# Altium PCB Ultrasonic_Localisation.PcbDoc
Units mm, origin at the board's own origin, x right, y up, seen from the top; angles counter-clockwise.
Board outline 29 x 59 mm, 4 copper layers (Top Layer, MidLayer1, GroundPlane, Bottom Layer); 51 components, 45 nets, 305 pads, 48 vias.
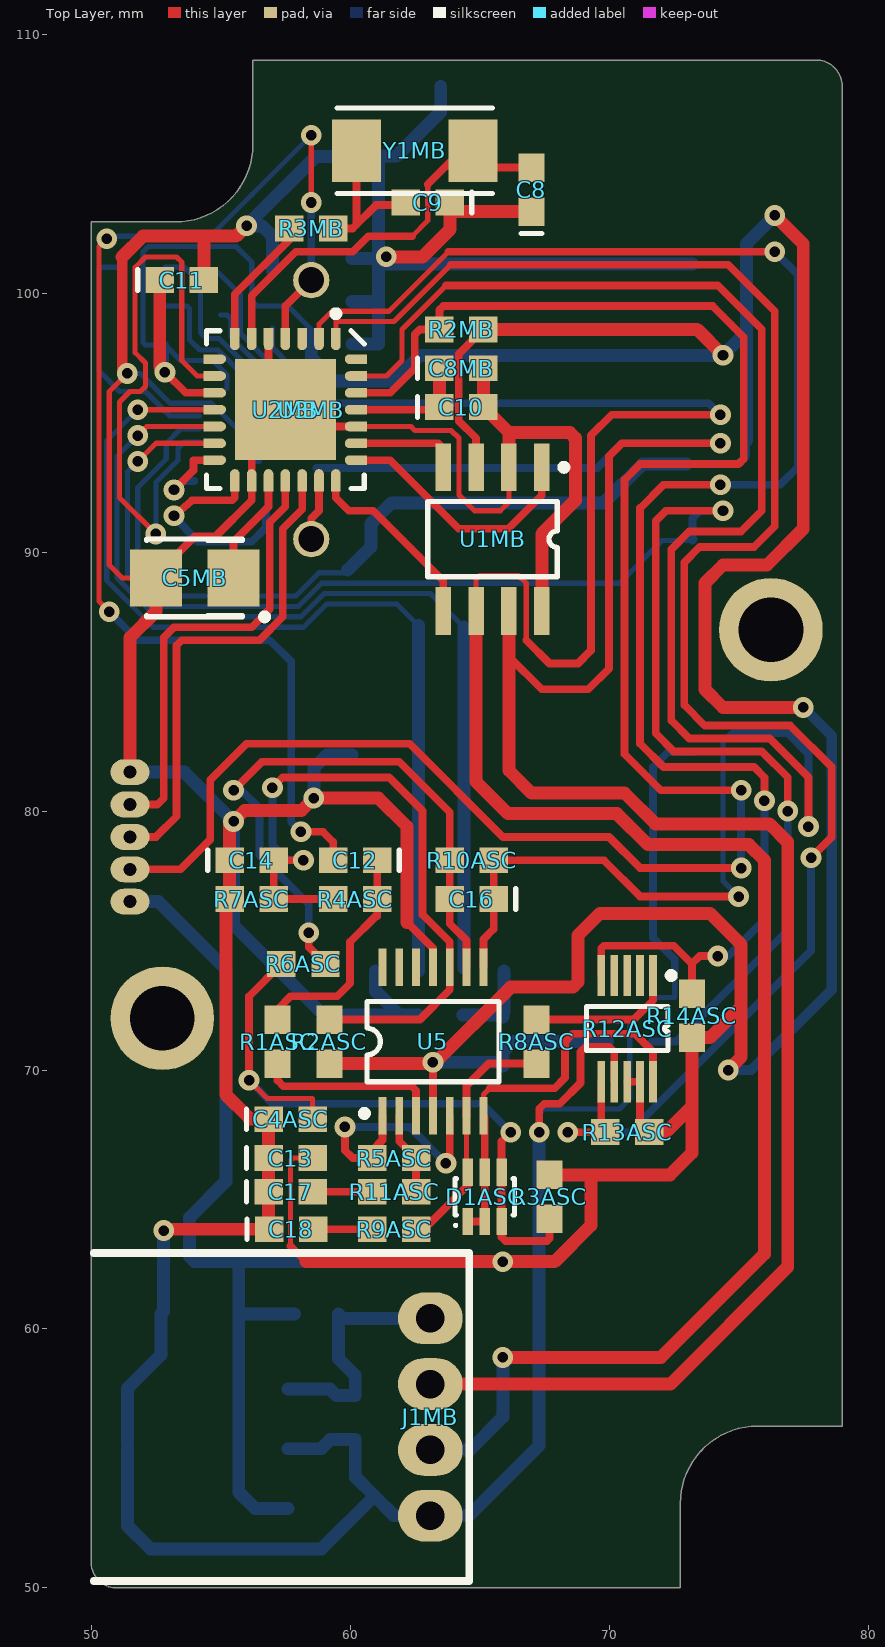
[diagram p0: Top Layer view]
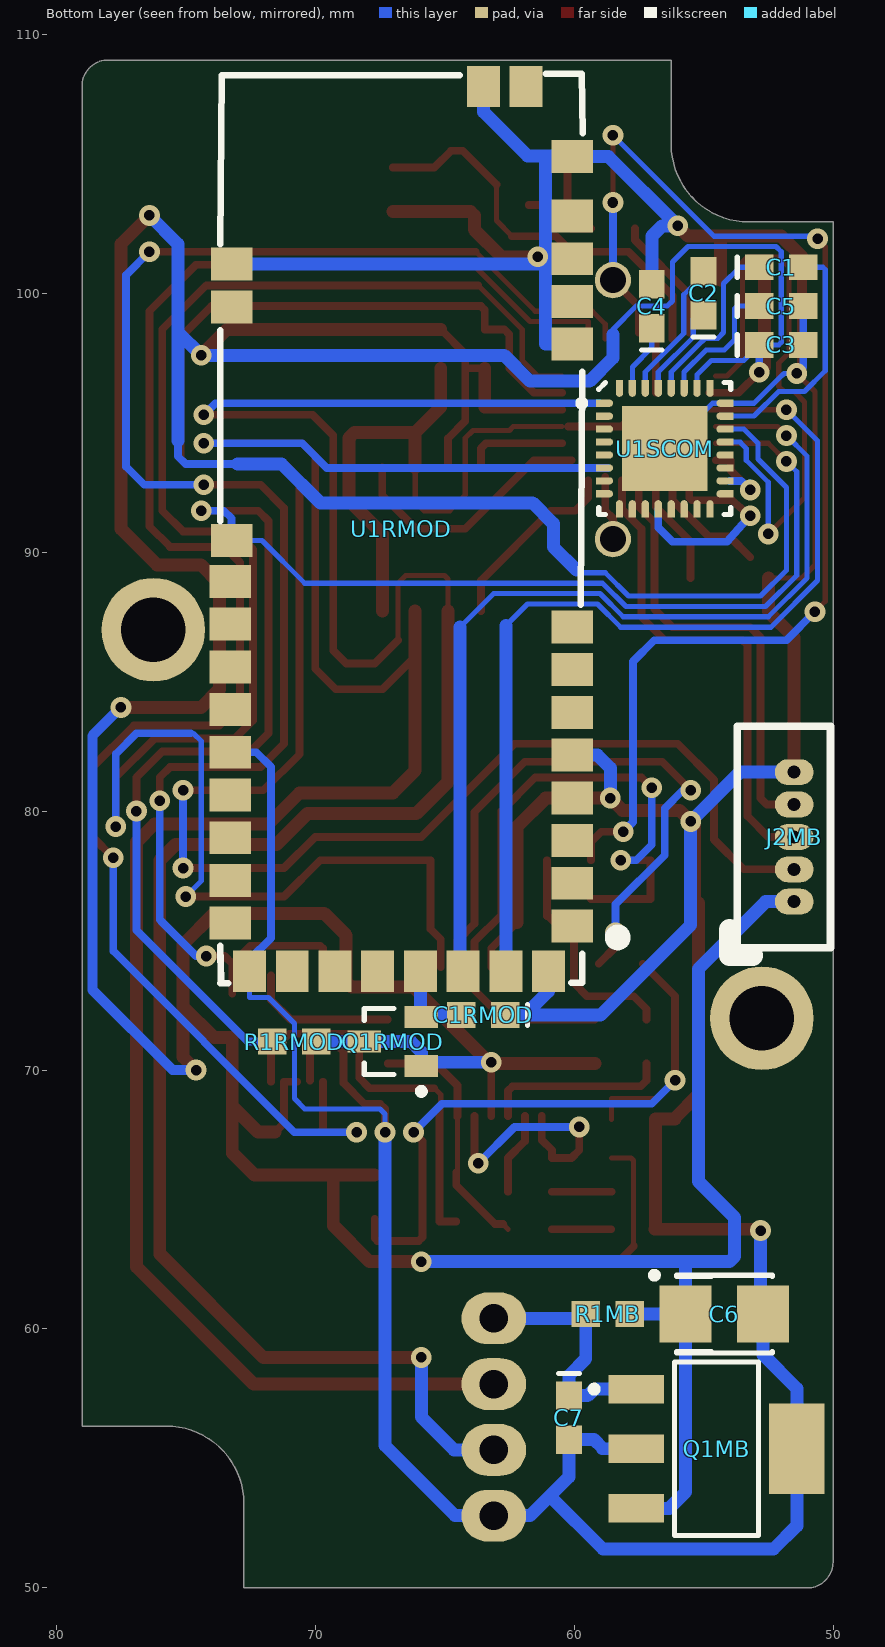
[diagram p1: Bottom Layer view, seen from below]
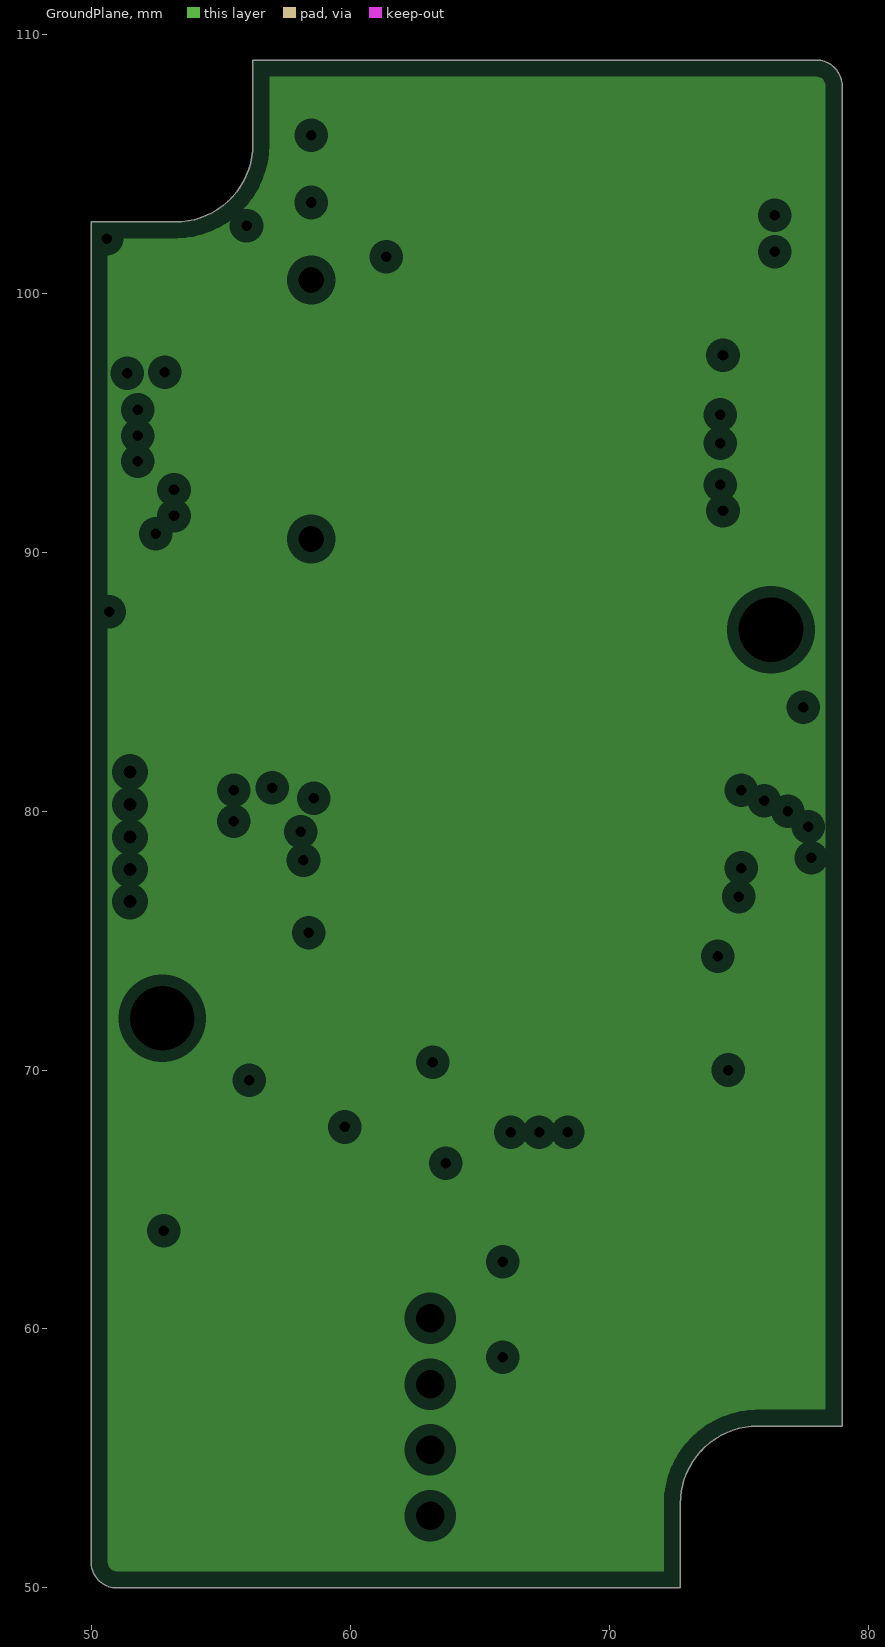
[diagram p2: GroundPlane, clearances drawn from the general rule]

## Layer stack, top to bottom
Top Layer: signal copper 0.036
Dielectric: prepreg 0.32, FR-4, Dk 4.8
MidLayer1: signal copper 0.036
Dielectric: core 0.32, FR-4, Dk 4.8
GroundPlane: plane copper 0.036
Dielectric: prepreg 0.32, FR-4, Dk 4.8
Bottom Layer: signal copper 0.036

## Board outline
50,51 50,102.75 53.25,102.75 ccw(c53.25,105.75) 56.25,105.75 56.25,109 78,109 cw(c78,108) 79,108 79,56.25 75.75,56.25 ccw(c75.75,53.25) 72.75,53.25 72.75,50 51,50 cw(c51,51)

## Design rules (kind name [scope] priority, off if disabled: settings)
Clearance [All] p1: gap=0.152
ComponentClearance [All] p1 off: gap=0.254 collisioncheckmode=3 verticalgap=0.254
HoleSize [All] p1: absolutevalues=TRUE maxlimit=4 minlimit=0.2 maxpercent=80.000 minpercent=20.000
PlaneClearance [All] p1: clearance=0.445
PlaneConnect [All] p1: planeconnectstyle=Direct reliefexpansion=0.508 reliefentries=4 reliefconductorwidth=0.254 reliefairgap=0.254
PolygonConnect [All] p1: connectstyle=Direct reliefconductorwidth=0.254 reliefentries=4 polygonreliefangle="90 Angle"
RoomDefinition S2 [InComponentClass('S2')] p1: confinementstyle=ConfineIn formatcopy=TRUE lockcomponents=FALSE outline 63.1,105.5 49.5,105.5 49.5,84 63.1,84
RoomDefinition Ultrasonic_Localisation [InComponentClass('Ultrasonic_Localisation')] p2: confinementstyle=ConfineIn formatcopy=TRUE lockcomponents=FALSE outline 48,47.85 77.475,47.85 77.475,109 48,109
RoomDefinition S3 [InComponentClass('S3')] p3: confinementstyle=ConfineIn formatcopy=TRUE lockcomponents=FALSE outline 76.3,68.9 56.8,68.9 56.8,110.9 76.3,110.9
RoomDefinition S1 [InComponentClass('S1')] p4: confinementstyle=ConfineIn formatcopy=TRUE lockcomponents=FALSE outline 52.7,62.2 75.2,62.2 75.2,82.4 52.7,82.4
RoutingVias [All] p1: holewidth=0.2 width=0.65 viastyle="Through Hole" minholewidth=0.2 minwidth=0.65 maxholewidth=1.5 maxwidth=2.1
ShortCircuit ShortCircuit_Unconnected_Pins [IsPad and not InnetClass('All') vs IsPad and not InnetClass('All')] p1: allowed=TRUE
ShortCircuit [All] p2: allowed=FALSE
SolderMaskExpansion [All] p1: expansion=0.075
TestPointUsage [All] p1: valid=0 allowmultiple=FALSE
Testpoint [All] p1: side=15 testpointundercomponent=TRUE minsize=1.016 maxsize=2.54 preferedsize=1.524 minholesize=0 maxholesize=1.016 preferedholesize=0.813 testpointgrid=0.025 style=1023 order=0-112345678
Width [All] p1: maxlimit=3 minlimit=0.152 preferedwidth=0.3 minimp=50.000000 maximp=50.000000 favimp=50.000000
14 further rules are at their usual default settings.

## Classes and differential pairs
component class S1: C4ASC C12 C13 C14 C15 C16 C17 C18 D1 D1ASC R1ASC R2ASC R3ASC R4 R4ASC R5 R5ASC R6 R6ASC R7 R7ASC R8 R8ASC R9 R9ASC R10 R10ASC R11 R11ASC R12 R12ASC R13 R13ASC R14 R14ASC U5
component class S2: C1 C2 C3 C4 C5 U1SCOM U6
component class Ultrasonic_Localisation: C5MB C6 C7 C8 C8MB C9 C10 C11 J1 J1MB J2 J2MB Q1 Q1MB R1 R1MB R2 R2MB R3 R3MB U1 U1MB U2 U2MB U3MB U4 Y1 Y1MB
component class S3: C1RMOD Q1RMOD R1RMOD U1RMOD

## Components (designator, comment, footprint, x,y, rotation, side; value= is the part's Value field where it differs from the comment)
C1 "UMK107BJ104KA-T" CC1608-0603 52,101 r180 bottom (schematic designator C1SCOM)
C1RMOD "Cap" CC1608-0603 63.5,72.125 r0 bottom
C2 "UMK107BJ104KA-T" CC1608-0603 55,100 r90 bottom (schematic designator C2SCOM)
C3 "UMK107BJ104KA-T" CC1608-0603 52,98 r180 bottom (schematic designator C3SCOM)
C4 "UMK107BJ104KA-T" CC1608-0603 57,99.5 r90 bottom (schematic designator C4SCOM)
C4ASC "Cap" CC1608-0603 57.7,68.1 r0 top
C5 "UMK107BJ104KA-T" CC1608-0603 52,99.5 r180 bottom (schematic designator C5SCOM)
C5MB "TPSB106K016R0800" TC3528-1411 54,89 r180 top
C6 "TPSB106K016R0800" TC3528-1411 54.2,60.575 r180 bottom (schematic designator C1MB)
C7 "UMK107BJ104KA-T" CC1608-0603 60.2,56.575 r270 bottom (schematic designator C2MB)
C8 "Cap" CC1608-0603 67,104 r90 top (schematic designator C6MB)
C8MB "UMK107BJ104KA-T" CC1608-0603 64.3,97.1 r0 top
C9 "Cap" CC1608-0603 63,103.5 r180 top (schematic designator C7MB)
C10 "UMK107BJ104KA-T" CC1608-0603 64.3,95.6 r0 top (schematic designator C3MB)
C11 "UMK107BJ104KA-T" CC1608-0603 53.5,100.5 r0 top (schematic designator C4MB)
C12 "Cap" CC1608-0603 60.2,78.1 r180 top (schematic designator C1ASC)
C13 "Cap" CC1608-0603 57.7,66.6 r0 top (schematic designator C2ASC)
C14 "Cap" CC1608-0603 56.2,78.1 r0 top (schematic designator C3ASC)
C16 "Cap" CC1608-0603 64.7,76.6 r180 top (schematic designator C5ASC)
C17 "Cap" CC1608-0603 57.7,65.3 r0 top (schematic designator C6ASC)
C18 "Cap" CC1608-0603 57.725,63.85 r0 top (schematic designator C7ASC)
D1ASC "BAV99DW-7-F" SOT-323-6L 65.2,65.1 r0 top
J1MB "70553-0003" CON_CAN_Device-4 63.1,56.6 r270 top
J2MB "53048-0510" CON_ISP 51.5,79 r90 bottom
Q1MB "MIC5201-5.0YS" DSO-G3 54.5,55.375 r270 bottom
Q1RMOD "BC846B" SO-G3 67,71.1 r90 bottom
R1ASC "Res" CR1608-0603 57.2,71.1 r90 top
R1MB "Res" CR1608-0603 58.7,60.575 r0 bottom
R1RMOD "Res" CR1608-0603 70.8,71.1 r180 bottom
R2ASC "Res" CR1608-0603 59.2,71.1 r270 top
R2MB "Res" CR1608-0603 64.3,98.6 r0 top
R3ASC "Res" CR1608-0603 67.7,65.1 r90 top
R3MB "Res" CR1608-0603 58.5,102.5 r0 top
R4ASC "Res" CR1608-0603 60.2,76.6 r180 top
R5ASC "Res" CR1608-0603 61.7,66.6 r0 top
R6ASC "Res" CR1608-0603 58.2,74.1 r180 top
R7ASC "Res" CR1608-0603 56.2,76.6 r0 top
R8ASC "Res" CR1608-0603 67.2,71.1 r90 top
R9ASC "Res" CR1608-0603 61.7,63.85 r0 top
R10ASC "Res" CR1608-0603 64.7,78.1 r180 top
R11ASC "Res" CR1608-0603 61.7,65.3 r180 top
R12ASC "AD5161" TSSO3x5-G10 70.7,71.6 r180 top
R13ASC "Res" CR1608-0603 70.7,67.6 r0 top
R14ASC "Res" CR1608-0603 73.2,72.1 r90 top
U1MB "p" SO-G8/E2.9 65.5,90.5 r180 top
U1RMOD "nanoLOC AVR Module" nano_LOC_AVR_Module35x14 66.675,90.9 r90 bottom
U1SCOM "p" QFN5X5-32 56.5,94 r270 bottom
U2MB "dsPIC33FJ128GP802" QFN6X6-28 57.5,95.5 r180 top
U3MB "MAXBOTIX_SENSOR" "Maxbotix Sensor" 58.5,95.5 r270 top
U5 "LMV324IPWR" TSSO5x6-G14/X.3 63.2,71.1 r0 top (schematic designator U1ASC)
Y1MB "CS10-16.000MABJ-UT" CS10 62.5,105.5 r180 top

## Footprints (in the part's own frame and the unit in brackets; to place one, negate y for a bottom-side part, rotate by r counter-clockwise, add the part's x,y. Pads: shape width x height; smd on the part's side, far side on the other; paste and mask are expansions set on the pad)
CC1608-0603 [mm] "Chip Capacitor; Body 1.6 x 0.8 mm (LxW typ)"
  rect 1.1x1 smd: 1(-0.85,0) 2(0.85,0)
  silkscreen extent -1.7,-0.4 -1.7,0.4
CON_CAN_Device-4 [mm] "4-pin CAN connector - device side"
  oval 2x2.5 hole 1.1: 1(-3.81,0) 2(-1.27,0) 3(1.27,0) 4(3.81,0)
  silkscreen extent -6.33,-13 6.33,1.5
CON_ISP [mm] "Microchip ISP Connector"
  oval 1x1.5 hole 0.5: 1(-2.5,0) 2(-1.25,0) 3(0,0) 4(1.25,0) 5(2.5,0)
  silkscreen extent -4.57,-1.4 4.28,2.5
CR1608-0603 [mm] "Chip Resistor; Body 1.6 x 0.8 mm (LxW typ)"
  rect 1.1x1 smd: 1(-0.85,0) 2(0.85,0)
CS10 [mm] "Crystal"
  rect 1.9x2.4 smd: 1(-2.25,0) 2(2.25,0)
  silkscreen extent -3,-1.65 3,1.65
DSO-G3 [mm] "SOT-223/SC-73; 4 Leads; Body 6.7 x 7.3 mm, inc. leads (LxW max)"
  rect 1.1x2.15 smd: 1(-2.3,-3.1) 2(0,-3.1) 3(2.3,-3.1)
  rect 3.5x2.15 smd: 4(0,3.1)
  silkscreen extent -3.35,-4.85 3.35,1.62
"Maxbotix Sensor" [mm] "Maxbotix Ultrasonic Sensor"
  round 1.4 hole 1: 1(-5,0) 2(5,0)
nano_LOC_AVR_Module35x14 [mm] "Footprint for the nano_LOC_AVR_Module"
  round 0.8 on Mech1: 1(-15.37,-1.86) 2(-14.1,-1.86) 3(-14.1,-3.13) 4(-14.1,-4.4) 5(-15.37,-4.4) 6(-15.37,-3.13) 7(-9.5,1.74) 8(-8.23,1.74) 9(-8.23,0.47) 10(-8.23,-0.8) 11(-9.5,-0.8) 12(-9.5,0.47)
  rect 1.27x1.6 smd: 1(-15.34,-6.6) 2(-13.69,-6.6) 3(-12.04,-6.6) 4(-10.39,-6.6) 5(-8.74,-6.6) 6(-7.09,-6.6) 7(-5.44,-6.6) 8(-3.79,-6.6) 10(7.13,-6.6) 11(8.78,-6.6) 12(10.43,-6.6) 13(12.08,-6.6) 14(14.37,-6.6) 17(10.22,6.55) 18(8.57,6.55) 19(-0.45,6.55) 20(-2.03,6.6) 21(-3.68,6.6) 22(-5.33,6.6) 23(-6.98,6.6) 24(-8.63,6.6) 25(-10.28,6.6) 26(-11.93,6.6) 27(-13.58,6.6) 28(-15.23,6.6)
  rect 1.6x1.27 smd: 15(17.08,-4.825) 16(17.08,-3.175) 29(-17.08,5.86) 30(-17.08,4.21) 31(-17.08,2.56) 32(-17.08,0.91) 33(-17.08,-0.74) 34(-17.08,-2.39) 35(-17.08,-4.04) 36(-17.08,-5.69)
  silkscreen extent -17.55,-8.61 17.57,6.99
QFN5X5-32 [mm] "Quad Flat No Lead; 32 Terminals; Body 5 x 5 mm; Pitch 0.5 mm"
  rect 0.28x0.28 smd: 1(-1.75,-2.515) 2(-1.25,-2.515) 3(-0.75,-2.515) 4(-0.25,-2.515) 5(0.25,-2.515) 6(0.75,-2.515) 7(1.25,-2.515) 8(1.75,-2.515) 9(2.515,-1.75) 10(2.515,-1.25) 11(2.515,-0.75) 12(2.515,-0.25) 13(2.515,0.25) 14(2.515,0.75) 15(2.515,1.25) 16(2.515,1.75) 17(1.75,2.515) 18(1.25,2.515) 19(0.75,2.515) 20(0.25,2.515) 21(-0.25,2.515) 22(-0.75,2.515) 23(-1.25,2.515) 24(-1.75,2.515) 25(-2.515,1.75) 26(-2.515,1.25) 27(-2.515,0.75) 28(-2.515,0.25) 29(-2.515,-0.25) 30(-2.515,-0.75) 31(-2.515,-1.25) 32(-2.515,-1.75)
  oval 0.28x0.66 smd: 1(-1.75,-2.325) 2(-1.25,-2.325) 3(-0.75,-2.325) 4(-0.25,-2.325) 5(0.25,-2.325) 6(0.75,-2.325) 7(1.25,-2.325) 8(1.75,-2.325) 17(1.75,2.325) 18(1.25,2.325) 19(0.75,2.325) 20(0.25,2.325) 21(-0.25,2.325) 22(-0.75,2.325) 23(-1.25,2.325) 24(-1.75,2.325)
  oval 0.66x0.28 smd: 9(2.325,-1.75) 10(2.325,-1.25) 11(2.325,-0.75) 12(2.325,-0.25) 13(2.325,0.25) 14(2.325,0.75) 15(2.325,1.25) 16(2.325,1.75) 25(-2.325,1.75) 26(-2.325,1.25) 27(-2.325,0.75) 28(-2.325,0.25) 29(-2.325,-0.25) 30(-2.325,-0.75) 31(-2.325,-1.25) 32(-2.325,-1.75)
  rect 3.3x3.3 smd: 33(0,0)
  silkscreen extent -2.55,-3.33 2.55,2.55
QFN6X6-28 [mm] "Quad Flat No Lead, Plastic, Punch; 28 Terminals; Body 6 x 6 mm; Pitch 0.65 mm"
  rect 0.37x0.37 smd: 1(-1.95,-2.97) 2(-1.3,-2.97) 3(-0.65,-2.97) 4(0,-2.97) 5(0.65,-2.97) 6(1.3,-2.97) 7(1.95,-2.97) 8(2.97,-1.95) 9(2.97,-1.3) 10(2.97,-0.65) 11(2.97,0) 12(2.97,0.65) 13(2.97,1.3) 14(2.97,1.95) 15(1.95,2.97) 16(1.3,2.97) 17(0.65,2.97) 18(0,2.97) 19(-0.65,2.97) 20(-1.3,2.97) 21(-1.95,2.97) 22(-2.97,1.95) 23(-2.97,1.3) 24(-2.97,0.65) 25(-2.97,0) 26(-2.97,-0.65) 27(-2.97,-1.3) 28(-2.97,-1.95)
  oval 0.37x0.86 smd: 1(-1.95,-2.725) 2(-1.3,-2.725) 3(-0.65,-2.725) 4(0,-2.725) 5(0.65,-2.725) 6(1.3,-2.725) 7(1.95,-2.725) 15(1.95,2.725) 16(1.3,2.725) 17(0.65,2.725) 18(0,2.725) 19(-0.65,2.725) 20(-1.3,2.725) 21(-1.95,2.725)
  oval 0.86x0.37 smd: 8(2.725,-1.95) 9(2.725,-1.3) 10(2.725,-0.65) 11(2.725,0) 12(2.725,0.65) 13(2.725,1.3) 14(2.725,1.95) 22(-2.725,1.95) 23(-2.725,1.3) 24(-2.725,0.65) 25(-2.725,0) 26(-2.725,-0.65) 27(-2.725,-1.3) 28(-2.725,-1.95)
  rect 3.9x3.9 smd: 29(0,0)
  silkscreen extent -3.05,-3.83 3.05,3.05
SO-G3 [mm] "SOT-23; 3 Leads; Body 3.0 x 2.6 mm, inc. leads (LxW max)"
  rect 0.85x1.3 smd: 1(-0.95,-1.1) 2(0.95,-1.1) 3(0,1.1)
  silkscreen extent -2.05,-1.22 1.28,1.1
SO-G8/E2.9 [mm] "Small Outline; 8 Leads; Body Width 3.9 mm; Pitch 1.27 mm"
  rect 0.6x1.85 smd: 1(-1.905,-2.775) 2(-0.635,-2.775) 3(0.635,-2.775) 4(1.905,-2.775) 5(1.905,2.775) 6(0.635,2.775) 7(-0.635,2.775) 8(-1.905,2.775)
  silkscreen extent -2.88,-2.9 2.5,1.45
SOT-323-6L [mm] "SOT-323-6L"
  rect 0.4x1.05 smd: 1(-0.65,-0.95) 2(0,-0.95) 3(0.65,-0.95) 4(0.65,0.95) 5(0,0.95) 6(-0.65,0.95)
  silkscreen extent -1.17,-1.15 1.15,0.7
TC3528-1411 [mm] "Capacitor, SM Tantalum; Body 3.5 x 2.8 mm (LxW typ)"
  rect 2x2.2 smd: 1(-1.5,0) 2(1.5,0)
  silkscreen extent -2.83,-1.5 1.85,1.62
TSSO3x5-G10 [mm] "Shrink Small Outline; 10 Leads; Body Width 3 mm; Pitch 0.5 mm"
  rect 0.3x1.6 smd: 1(-1,-2.05) 2(-0.5,-2.05) 3(0,-2.05) 4(0.5,-2.05) 5(1,-2.05) 6(1,2.05) 7(0.5,2.05) 8(0,2.05) 9(-0.5,2.05) 10(-1,2.05)
  silkscreen extent -1.83,-2.17 1.57,0.85
TSSO5x6-G14/X.3 [mm] "Shrink Small Outline; 14 Leads; Body Width 4.4 mm; Pitch 0.65 mm"
  rect 0.3x1.45 smd: 1(-1.95,-2.875) 2(-1.3,-2.875) 3(-0.65,-2.875) 4(0,-2.875) 5(0.65,-2.875) 6(1.3,-2.875) 7(1.95,-2.875) 8(1.95,2.875) 9(1.3,2.875) 10(0.65,2.875) 11(0,2.875) 12(-0.65,2.875) 13(-1.3,2.875) 14(-1.95,2.875)
  silkscreen extent -2.77,-2.9 2.55,1.55

## Part data
C1 C2 C3 C4 C5 C7 C8MB C10 C11: library part Cap, "Capacitor"
C1RMOD C4ASC C8 C9 C12 C13 C14 C16 C17 C18: "Capacitor"
C5MB C6: library part "Cap Pol", "Polarized Capacitor (Surface Mount)"
D1ASC: library part BAV99DW, "Quad surface mount switching diode array"
J1MB: library part CON_CAN_DEVICE, "4 pin CAN Connector 2.54mm pitch"
J2MB: library part CON_ISP_Header_5p_1.25mm_horizontal, "6 pin header - 1.25mm pitch horizontal"
Q1MB: "5V LDO 200mA"
Q1RMOD: "NPN Bipolar Transistor"
R1ASC R1MB R1RMOD R2ASC R2MB R3ASC R3MB R4ASC R5ASC R6ASC R7ASC R8ASC R9ASC R10ASC R11ASC R13ASC R14ASC: "Resistor"
R12ASC: library part AD5161_3x5, "AD5161 SPI/I2C Selectable Digital Potentiometer"
U1MB: library part SN65HVD234D, "3.3V CAN Transceiver"
U1RMOD: "Radio Transceiver and Localisation module"
U1SCOM: library part MAX3243E_SMALL, "RS232 Transceiver"
U2MB: "dsPIC33FJ128GP802 with 2 UART's"
U3MB: "Maxbotix Ultrasonic Sensor"
U5: "Rail-to-Rail Operational Amplifier"
Y1MB: library part CS10, "Crystal Oscillator"

## Free pads (board coordinates)
  round 4 hole 2.5: 0(52.75,72) 0(76.25,87)

## Via types
v1: diameter 0.8, hole 0.406, Top Layer to Bottom Layer, 48 vias

## Nets (pads, with @x,y where several pads share a name; then routed paths per layer and width w, separated by ;. In a path a pad name is that pad's centre, name@x,y a point inside that pad or via, vN(x,y) a via of type N, cw(c..) or ccw(c..) an arc to the next point about the centre after c; other vN are vias at no path point)
A: R8ASC.2 R12ASC.1 | length 5.8
  Top Layer w0.3: R8ASC.2 70.95,71.95 71.7,72.7 R12ASC.1
CAN_EN: U1MB.5 U2MB.21 | length 7.3
  Top Layer w0.3: U2MB.21@59.45,92.775 59.45,92.1 59.952,91.597 60.897,91.597 63.595,88.9 U1MB.5
CAN_RX: U1MB.4 U2MB.23 | length 3.9
  Top Layer w0.3: U2MB.23@60.47,94.2 63.4,94.2 63.595,94.005 U1MB.4
CAN_TX: U1MB.1 U2MB.22 | length 10.1
  Top Layer w0.3: U1MB.1 67.405,92.2 66.105,90.9 64.2,90.9 61.55,93.55 U2MB.22@60.225,93.55 ; U2MB.22@60.225,93.55 60.1,93.55 U2MB.22@60.225,93.55
CANH/UART_TX: J1MB.2 U1MB.7 U1SCOM.6 | length 83.5
  Top Layer w0.3: 66.15,85.95 67.4,84.7 69.2,84.7 70,85.5 70,93.7 70.5,94.2 v1(74.3,94.2)
  Top Layer w0.5: J1MB.2 72.37,57.87 76.9,62.4 76.9,78.8 76.2,79.5 71.8,79.5 70.6,80.7 67,80.7 66.135,81.565 U1MB.7
  Bottom Layer w0.3: U1SCOM.6@58.7,93.25 69.55,93.25 70.5,94.2 v1(74.3,94.2)
CANL/UART_RX: J1MB.3 U1MB.6 U1SCOM.1 | length 89.3
  Top Layer w0.2: U1MB.6 64.865,88.965 65,89.1 66.5,89.1 66.8,88.8 66.8,86.6
  Top Layer w0.3: 66.8,86.6 67.7,85.7 68.8,85.7 69.3,86.2 69.3,94.5 70.1,95.3 v1(74.3,95.3)
  Top Layer w0.5: U1MB.6 64.865,81.135 66.1,79.9 70.3,79.9 71.5,78.7 75.4,78.7 76,78.1 76,62.9 72,58.9 v1(65.9,58.9)
  Bottom Layer w0.3: U1SCOM.1@59.015,95.75 73.85,95.75 v1(74.3,95.3)
  Bottom Layer w0.5: J1MB.3 64.63,55.33 65.9,56.6 v1(65.9,58.9)
DIG_IP_1: C12.2 U2MB.4 U3MB.1 | length 49.5
  Top Layer w0.2: v1(50.6,102.1) 50.3,101.8 50.3,88.1 v1(50.7,87.7) ; v1(58.5,103.5) v1(58.5,106.1)
  Top Layer w0.3: U2MB.4@57.5,98.47 57.5,99.5 U3MB.1 ; v1(58.1,79.2) 58.95,79.2 59.35,78.8 C12.2
  Bottom Layer w0.2: v1(50.6,102.1) 50.7,102.2 54.6,102.2 56.2,103.8 v1(58.5,106.1)
  Bottom Layer w0.3: v1(50.7,87.7) 51.8,86.6 56.9,86.6 57.725,85.775 57.725,79.575 v1(58.1,79.2) ; U3MB.1@58.5,100 v1(58.5,103.5)
DIG_IP_2: U2MB.20 U3MB.2 | length 2.5
  Top Layer w0.3: U3MB.2 58.5,91.3 58.8,91.6 U2MB.20@58.8,92.9
GND: C1RMOD.1 C3.2 C4.2 C4ASC.1 C5.2 C5MB.2 C6.2 C7.2 C8.1 C8MB.2 C9.1 C10.2 C11.2 C13.1 C14.1 C17.1 C18.1 J1MB.4 J2MB.5 Q1MB.2 Q1MB.4 R7ASC.1 R12ASC.7 U1MB.2 U1MB.8 U1RMOD.5@60.075,82.16 U1RMOD.10@60.075,98.03 U1RMOD.11@60.075,99.68 U1RMOD.12@60.075,101.33 U1RMOD.13 U1RMOD.14 U1RMOD.16 U1RMOD.17 U1RMOD.24 U1RMOD.29 U1RMOD.36 U1SCOM.24 U1SCOM.33 U2MB.5 U2MB.16 U2MB.24 U2MB.29 U5.11 | length 248.6
  Top Layer w0.2: v1@51.4,96.8 v1(51.4,96.9) 50.7,96.2 50.7,89.5 51.2,89 C5MB.2 ; U2MB.29@56.2,94.2 U2MB.29 ; U2MB.24@60.47,94.85 62.35,94.85 62.5,94.7 63.9,94.7 64.2,94.4 64.2,92.2 64.8,91.6 65.8,91.6 66.135,91.935 U1MB.2
  Top Layer w0.3: C5MB.2@53.2,89.8 54,90.6 54.8,90.6 56.2,92 56.2,92.1 U2MB.29@56.2,94.2 ; U2MB.29@56.85,96.15 U2MB.5@56.85,98.225 ; U2MB.29 58.15,94.85 U2MB.24@60.225,94.85 ; 62.2,75.7 63.2,74.7 U5.11 ; v1(67.3,67.6) 67.3,68.5 67.5,68.7 68.1,68.7 68.9,69.5 68.9,70.7 69.1,70.9 70,70.9 70.2,70.7 70.2,70.6 R12ASC.7@70.2,69.6
  Top Layer w0.4: 51.2,101.4 51.2,97.1 v1(51.4,96.9)
  Top Layer w0.5: 51.2,101.4 52,102.2 55.6,102.2 v1(56,102.6) ; J2MB.5 51.5,86.7 52.5,87.7 C5MB.2 ; v1@52.85,63.85 C18.1 56.85,63.875 C17.1 C4ASC.1 56.1,68.1 56.1,68.104 56.1,68.15 55.2,69.05 55.2,76.45 R7ASC.1 55.35,79.45 55.925,80.025 58.125,80.025 v1(58.6,80.5) 61.1,80.5 62.2,79.4 62.2,75.7 ; C11.2 54.35,102.15 ; v1(61.4,101.4) 62.8,101.4 63.85,102.45 63.85,103 64,103.15 C8.1 ; C8MB.2 C10.2 66.135,94.615 ; U1MB.2 66.135,94.615 ; U1MB.8 67.405,90.705 68.7,92 68.7,94.4 68.485,94.615 66.135,94.615
  Bottom Layer w0.2: v1(51.4,96.9) 51.9,96.9 52.1,96.7 53.05,95.75 54.65,95.75 56.4,94 U1SCOM.33 ; U1SCOM.33@56.3,93.5 U1SCOM.33@56.5,93.5 ; v1(67.3,67.6) 67.3,68.3 67.5,68.5 70.4,68.5 70.8,68.9 70.8,71.8 71.8,72.8 72.535,72.8 U1RMOD.29
  Bottom Layer w0.3: C5.2 C3.2 51.15,97.15 v1(51.4,96.9) ; U1RMOD.29 72.535,74.265 71.7,75.1 71.7,81.7 72.27,82.27 U1RMOD.24
  Bottom Layer w0.5: Q1MB.4 51.4,52.4 52.3,51.5 58.887,51.5 60.939,53.551 ; Q1MB.4@51.4,55.6 51.4,57.3 51.4,57.7 52.7,59 C6.2 52.8,60.675 v1(52.8,63.8) ; J2MB.5 53.6,81.5 v1(55.5,79.6) 55.5,75.6 58.975,72.125 C1RMOD.1 ; C4.2@57,100.85 57,102.2 56.6,102.6 v1(56,102.6) 58.67,105.27 U1RMOD.14 ; Q1MB.2 58.9,55.375 58.9,55.4 59.225,55.725 C7.2 60.2,54.29 60.939,53.551 ; v1(58.6,80.5) 58.6,81.66 59.1,82.16 U1RMOD.5@60.075,82.16 ; U1RMOD.10@60.075,98.03 61.1,98.03 61.1,99.68 U1RMOD.11@60.075,99.68 ; U1RMOD.12@60.075,101.33 61.1,101.33 61.31,101.12 U1RMOD.17 ; U1RMOD.14@60.4,105.3 61.8,105.3 63.5,107 U1RMOD.16 ; U1RMOD.36 60.985,73.04 61.9,72.125 ; 61.1,99.7 61.1,105.27 ; v1(67.3,67.6) 67.3,55.5 64.6,52.8 64.6,52.79 61.7,52.79 60.939,53.551
M\C\L\R\: J2MB.2 R2MB.1 U2MB.26 | length 75.1
  Top Layer w0.3: J2MB.2 53.45,77.75 54.6,78.9 54.6,81.2 56,82.6 62.3,82.6 65.9,79 70,79 71.2,77.8 v1(75.1,77.8) ; U2MB.26@60.47,96.15 61.55,96.15 62.5,97.1 62.5,98.4 62.7,98.6 R2MB.1 63.45,99.35 63.6,99.5 74,99.5 75.2,98.3 75.2,93.6 75,93.4 71.2,93.4 70.6,92.8 70.6,82.2 72,80.8 v1(75.1,80.8)
  Bottom Layer w0.3: v1(75.1,77.8) v1(75.1,80.8)
NetC1_1: C1.1 U1SCOM.28 | length 6.8
  Bottom Layer w0.2: C1.1 53.6,101 54.225,100.375 54.225,98.475 54.45,98.25 54.95,98.25 55.232,97.968 55.744,97.456 56.25,96.95 U1SCOM.28@56.25,96.325
NetC1_2: C1.2 U1SCOM.23 | length 9.4
  Bottom Layer w0.2: 50.4,101 50.3,100.9 50.3,97 51.1,96.2 52.1,96.2 53.05,95.25 U1SCOM.23@54.175,95.25 ; 50.4,101 C1.2
NetC1RMOD_2: C1RMOD.2 Q1RMOD.2 U1RMOD.33 | length 3.3
  Bottom Layer w0.5: C1RMOD.2 Q1RMOD.2@65.825,72.125 ; Q1RMOD.2 Q1RMOD.2@65.825,72.125 ; U1RMOD.33 65.935,72.235 Q1RMOD.2@65.825,72.125
NetC2_1: C2.1 U1SCOM.29 | length 3.7
  Bottom Layer w0.2: C2.1 55.25,99.15 55.4,99 55.4,98.3 56.75,96.95 U1SCOM.29@56.75,96.325
NetC2_2: C2.2 U1SCOM.30 | length 5.4
  Bottom Layer w0.2: C2.2@54.925,100.775 55.762,99.937 55.762,98.438 57.25,96.95 U1SCOM.30@57.25,96.325
NetC4_1: C4.1 U1SCOM.31 | length 2.6
  Bottom Layer w0.2: C4.1 57,97.9 57.75,97.15 U1SCOM.31@57.75,96.325
NetC4ASC_2: C4ASC.2 D1ASC.3 D1ASC.4 R3ASC.1 R6ASC.2 | length 26.3
  Top Layer w0.2: v1(56.1,69.6) 56.8,68.9 58.5,68.9 ; C4ASC.2 58.55,68.9
  Top Layer w0.3: v1(56.1,69.6) 56.1,72.85 R6ASC.2 ; v1(66.2,67.6) 65.85,67.25 65.85,63.55 66,63.4 67.6,63.4 67.7,63.5 R3ASC.1
  Bottom Layer w0.3: v1(56.1,69.6) 57,68.7 65.1,68.7 v1(66.2,67.6)
NetC5_1: C5.1 U1SCOM.27 | length 5.3
  Bottom Layer w0.2: C5.1 53.7,99.5 53.8,99.4 53.8,98.2 54.2,97.8 54.9,97.8 55.75,96.95 U1SCOM.27@55.75,96.325
NetC5MB_1: C5MB.1 U2MB.17 | length 4.3
  Top Layer w0.3: C5MB.1 55.5,90.4 56.85,91.75 U2MB.17@56.85,92.775
NetC7_1: C7.1 J1MB.1 Q1MB.1 R1MB.2 | length 9.7
  Bottom Layer w0.5: Q1MB.1 59.225,57.675 59.475,57.425 C7.1 60.2,58.2 59.55,58.85 R1MB.2 59.715,60.41 J1MB.1
NetC8_2: C8.2 U2MB.6 Y1MB.1 | length 15.9
  Top Layer w0.2: 62.4,102.2 63,102.8 63,104.2
  Top Layer w0.3: U2MB.6@56.2,98.225 56.2,99.9 57.9,101.6 60.1,101.6 60.7,102.2 62.4,102.2 ; 63,104.2 64.3,105.5 Y1MB.1 65.4,104.85 C8.2
NetC9_2: C9.2 R3MB.2 Y1MB.2 | length 5.1
  Top Layer w0.3: R3MB.2 60.1,102.5 61,103.4 C9.2@61.75,103.4 ; 60.25,102.65 Y1MB.2@60.25,105
NetC12_1: C12.1 R1ASC.2 R4ASC.1 | length 8.8
  Top Layer w0.3: R1ASC.2 57.2,72.25 57.2,72.35 57.7,72.85 59.5,72.85 60,73.35 60,74.95 61,75.95 61.05,75.95 R4ASC.1 C12.1
NetC14_2: C14.2 R2ASC.1 R4ASC.2 R7ASC.2 U5.10 | length 28.7
  Top Layer w0.3: v1(57,80.9) 57.4,81.3 61.5,81.3 62.8,80 62.8,76 63.85,74.95 63.85,73.1 62.7,71.95 R2ASC.1 ; 57.8,78.1 C14.2 R7ASC.2 R4ASC.2 ; R4ASC.2 58.6,76.6 R4ASC.2
  Bottom Layer w0.3: v1(57,80.9) 57,78.7 57.6,78.1 v1(58.2,78.1)
NetC16_2: C16.2 R6ASC.1 R10ASC.2 U5.9 | length 24.2
  Top Layer w0.3: v1(55.5,80.8) 56.6,81.9 61.9,81.9 63.85,79.95 63.85,75.65 64.5,75 U5.9 ; v1(58.4,75.3) 58.4,74.75 R6ASC.1
  Bottom Layer w0.3: v1(55.5,80.8) 55.8,80.8 56.5,80.1 56.5,78.3 58.4,76.4 v1(58.4,75.3)
NetC17_2: C17.2 R11ASC.2 | length 2.3
  Top Layer w0.3: C17.2 R11ASC.2
NetC18_2: C18.2 R9ASC.1 | length 3
  Top Layer w0.3: C18.2 R9ASC.1 60.1,63.85
NetD1ASC_6: D1ASC.6 R8ASC.1 R9ASC.2 U5.6 | length 9.7
  Top Layer w0.2: R9ASC.2 R9ASC.2@62.75,64.05 ; D1ASC.6 64.5,66.1 U5.6 U5.6@64.55,68.175
  Top Layer w0.3: R9ASC.2@62.75,64.05 63.05,64.05 64.55,65.55 D1ASC.6 ; U5.6 64.5,69.4 65.35,70.25 R8ASC.1
NetR1ASC_1: R1ASC.1 U5.3 | length 7.1
  Top Layer w0.3: R1ASC.1 57.2,69.6 57.425,69.375 62.375,69.375 62.55,69.2 U5.3
NetR3MB_1: R3MB.1 U2MB.7 | length 4.9
  Top Layer w0.3: U2MB.7@55.55,98.47 55.55,99.95 57.65,102.05 R3MB.1
NetR5ASC_1: R5ASC.1 U5.1 U5.5 | length 10.2
  Top Layer w0.2: R5ASC.1@60.85,66.8 R5ASC.1@60.85,66.9
  Top Layer w0.3: v1(59.8,67.8) 59.8,66.9 60.1,66.6 R5ASC.1 R5ASC.1@60.85,66.8 ; R5ASC.1@60.85,66.9 61.25,67.3 U5.1 ; v1(63.7,66.4) 63.85,66.55 U5.5
  Bottom Layer w0.3: v1(59.8,67.8) 62.3,67.8 v1(63.7,66.4)
NetR5ASC_2: R5ASC.2 R11ASC.1 U5.2 | length 3.2
  Top Layer w0.3: U5.2 61.9,67.25 R5ASC.2 R11ASC.1
NLOC_RX: U1RMOD.35 U2MB.11 | length 36.9
  Top Layer w0.2: v1(51.8,95.5) U2MB.11@54.775,95.5
  Bottom Layer w0.2: v1(51.8,95.5) 50.6,94.3 50.6,88.9 52.4,87.1 58.2,87.1 59.1,88 61.8,88 62.635,87.165
  Bottom Layer w0.5: U1RMOD.35 62.635,87.165
NLOC_TX: U1RMOD.34 U2MB.12 | length 37
  Top Layer w0.2: v1(51.8,94.5) 52.15,94.85 U2MB.12@54.53,94.85
  Bottom Layer w0.2: v1(51.8,94.5) 51,93.7 51,89 52.5,87.5 58.1,87.5 59,88.4 63.1,88.4 64.4,87.1 ; U1RMOD.34 U1RMOD.34@64.4,73.935
  Bottom Layer w0.5: U1RMOD.34@64.4,73.935 64.4,87.1
PGC: J2MB.4 U2MB.18 | length 17.1
  Top Layer w0.3: J2MB.4 52.55,80.25 52.8,80.5 52.8,86.7 53.2,87.1 56.2,87.1 56.9,87.8 56.9,91.15 57.5,91.75 U2MB.18@57.5,92.53
PGD: J2MB.3 U2MB.19 | length 18.9
  Top Layer w0.3: J2MB.3 52.5,79 53.3,79.8 53.3,86.4 53.5,86.6 56.5,86.6 57.4,87.5 57.4,90.9 58.15,91.65 U2MB.19@58.15,92.775
RAD_R\S\T\: R1RMOD.1 U1RMOD.19 U2MB.13 | length 62.9
  Top Layer w0.2: v1(51.8,93.5) 52.5,94.2 U2MB.13@54.53,94.2
  Top Layer w0.3: v1(74.4,91.6) 72.2,91.6 71.8,91.2 71.8,89.8 71.8,83 72.5,82.3 75.9,82.3 76.9,81.3 v1(76.9,80)
  Bottom Layer w0.2: v1(51.8,93.5) 51.4,93.1 51.4,89.1 52.603,87.897 57.997,87.897 58.9,88.8 70.4,88.8 72.05,90.45 U1RMOD.19
  Bottom Layer w0.3: R1RMOD.1 72.6,71.1 76.9,75.4 v1(76.9,80) ; U1RMOD.19@73.275,90.5 U1RMOD.19 73.225,91.3 73.525,91.6 v1(74.4,91.6)
SCL: R12ASC.6 R13ASC.1 U2MB.1 | length 67
  Top Layer w0.2: U2MB.1@59.45,98.225 59.45,98.9 61.7,98.9 63.9,101.1
  Top Layer w0.3: 63.9,101.1 74.6,101.1 76.4,99.3 76.4,91 75.6,90.2 73.5,90.2 72.9,89.6 72.9,84.1 73.7,83.3 77,83.3 78.6,81.7 78.6,79 v1(77.8,78.2) ; v1(68.4,67.6) R13ASC.1 ; R13ASC.1@69.7,67.6 R12ASC.6
  Bottom Layer w0.3: v1(68.4,67.6) 70.8,67.6 77.8,74.6 v1(77.8,78.2)
SDA: R12ASC.5 R14ASC.2 U2MB.2 | length 64.2
  Top Layer w0.2: U2MB.2@58.8,98.225 58.8,98.8 59.3,99.3 61.5,99.3 63.8,101.6
  Top Layer w0.3: 63.8,101.6 v1(76.4,101.6) ; R12ASC.5 69.7,74.7 69.8,74.8 72.5,74.8 73.2,74.1 ; R14ASC.2 73.2,74.1 ; v1(74.2,74.4) 73.5,74.4 73.2,74.1 ; v1(74.3,92.6) 72.1,92.6 71.2,91.7 71.2,82.6 72.1,81.7 75.6,81.7 76,81.3 v1(76,80.4)
  Bottom Layer w0.3: v1(74.2,74.4) 74.6,74.4 75.953,75.753 ; v1(74.3,92.6) 76.6,92.6 77.3,93.3 77.3,100.7 v1(76.4,101.6) ; 76,75.8 v1(76,80.4)
SNSR_OP: C16.1 R10ASC.1 U2MB.27 U5.8 | length 71.2
  Top Layer w0.2: U2MB.27@60.47,96.8 61.4,96.8 62,97.4 62,98.6 63.7,100.3
  Top Layer w0.3: 63.7,100.3 74.2,100.3 75.9,98.6 75.9,91.6 75.1,90.8 73.1,90.8 72.4,90.1 72.4,83.5 73.1,82.8 76.2,82.8 77.7,81.3 v1(77.7,79.4) ; U5.8 65.15,75.05 65.55,75.45 R10ASC.1 69.8,78.1 71.2,76.7 v1(75,76.7)
  Bottom Layer w0.2: 74.8,83 74.7,83 74.4,82.7 74.4,77.3 v1(75,76.7)
  Bottom Layer w0.3: 74.8,83 76.9,83 77.7,82.2 v1(77.7,79.4)
U\A\R\T\_\E\N\: U1SCOM.21 U2MB.9 | length 23.4
  Top Layer w0.2: v1(52.5,90.7) 51.1,92.1 51.1,95.8 51.5,96.2 51.9,96.2 52.1,96.4 52.1,97.3 51.7,97.7 51.7,101 52.1,101.4 53.3,101.4 53.5,101.2 53.5,97.4 54.1,96.8 U2MB.9@54.53,96.8
  Bottom Layer w0.2: v1(52.5,90.7) 52.5,91.2 52.5,92.7 53.35,93.55 53.35,94 53.575,94.225 53.575,94.25 U1SCOM.21@54.175,94.25
USART/RX: U1SCOM.18 U2MB.14 | length 3.2
  Top Layer w0.3: v1(53.2,92.4) 53.95,93.15 53.95,93.55 U2MB.14@54.53,93.55
  Bottom Layer w0.3: v1@53.2,92.65 v1(53.2,92.4) 53.55,92.75 U1SCOM.18@53.985,92.75
USART/TX: U1SCOM.12 U2MB.15 | length 8.2
  Top Layer w0.3: v1(53.2,91.4) 53.9,92 55.45,92 55.55,92.1 U2MB.15@55.55,92.775
  Bottom Layer w0.3: v1(53.2,91.4) 54.1,90.4 56.2,90.4 56.75,90.95 U1SCOM.12@56.75,91.675
VCC3V3: C3.1 C6.1 C8MB.1 C10.1 C11.1 C13.2 J2MB.1 Q1MB.3 Q1RMOD.1 Q1RMOD.3 R1MB.1 R1RMOD.2 R2ASC.2 R2MB.2 R3ASC.2 R12ASC.8 R12ASC.9 R13ASC.2 R14ASC.1 U1MB.3 U1SCOM.22 U1SCOM.26 U2MB.10 U2MB.25 U5.4 | length 262
  Top Layer w0.2: 57.7,63.2 57.7,66.5 57.8,66.6 C13.2
  Top Layer w0.3: v1(52.85,96.95) 53.65,96.15 U2MB.10@54.775,96.15 ; 57.7,63.2 58.3,62.6 ; U2MB.25@60.47,95.5 63.35,95.5 C10.1 ; U5.4 v1@63.2,70.2 ; C8MB.1 64.2,97.1 ; U1MB.3 64.865,94.4 64.2,95.065 64.2,97.65 R2MB.2 ; R12ASC.8 R12ASC.9 71.2,67.95 R13ASC.2
  Top Layer w0.5: v1@52.65,97.15 C11.1 ; 58.3,62.6 67.9,62.6 69.3,64 69.3,65.95 ; R2ASC.2 v1@63.15,70.25 ; v1@63.2,70.2 66.2,73.2 68.6,73.2 68.8,73.4 68.8,75.2 69.65,76.05 73.9,76.05 75.1,74.85 75.1,70.5 v1(74.6,70) ; 63.45,96.3 C10.1 C8MB.1 ; R2MB.2 73.4,98.6 v1(74.4,97.6) ; R3ASC.2 72.35,65.95 73.2,66.8 R14ASC.1 73.9,71.25 75.1,72.45 ; R13ASC.2 72.2,67.6 73.2,68.6 ; v1(76.4,103) 77.5,101.9 77.5,90.9 76.1,89.5 74.4,89.5 73.7,88.8 73.7,84.7 74.4,84 v1(77.5,84)
  Bottom Layer w0.2: U1SCOM.22@54.175,94.75 53.45,94.75 52.9,94.2 52.9,93.6 51.8,92.5 51.8,89.3 52.8,88.3 57.9,88.3 58.8,89.2 59.8,89.2 ; U1SCOM.26@55.25,96.325 55.25,96.85 54.7,97.4 53.45,97.4 C3.1 52.1,98 52,98.1 52,101.6 52.2,101.8 55.6,101.8 56.2,101.2 56.2,99.7 56.4,99.5 57.6,99.5 58.5,98.6 58.5,98.4
  Bottom Layer w0.3: v1(52.85,96.95) C3.1 ; 73,93.4 75,93.4 75.3,93.7 75.3,94.3
  Bottom Layer w0.4: v1(74.6,70) 75.5,70 78.6,73.1 78.6,82.9 v1(77.5,84)
  Bottom Layer w0.5: J2MB.1 52.6,76.5 55.2,73.9 55.2,65.7 53.8,64.3 53.8,62.8 54,62.6 v1(65.9,62.6) ; C6.1 R1MB.1 ; 55.7,62.6 55.7,53.7 56.325,53.075 Q1MB.3 ; 58.5,98.4 58.5,97.5 59.4,96.6 61.7,96.6 62.7,97.6 v1(74.4,97.6) 75.3,98.5 ; 59.902,89.302 60.8,90.2 60.8,91.1 61.6,91.9 69.8,91.9 71.3,93.4 73,93.4 ; v1(63.2,70.3) 65.75,70.3 Q1RMOD.1 65.9,70.7 66.3,71.1 66.967,71.1 67.3,71.1 R1RMOD.2 69.2,71.1 ; 75.3,94.3 75.3,101.9 v1(76.4,103)
W: D1ASC.1 D1ASC.2 D1ASC.5 R12ASC.10 U5.7 | length 15.4
  Top Layer w0.2: U5.7@65.2,68.175 U5.7 65.15,69.05 65.4,69.3 ; 71.6,70.8 71.7,70.7
  Top Layer w0.3: D1ASC.1 D1ASC.2 U5.7@65.2,68.175 ; 65.4,69.3 67.9,69.3 68.3,69.7 68.3,71.1 68.6,71.4 71,71.4 71.6,70.8 ; R12ASC.10 71.7,70.7
pads on no net: R12ASC.2 R12ASC.3 R12ASC.4 U1RMOD.1 U1RMOD.2 U1RMOD.3 U1RMOD.4 U1RMOD.5@62.275,75.53 U1RMOD.6 U1RMOD.7 U1RMOD.8 U1RMOD.9 U1RMOD.10@65.875,82.67 U1RMOD.11@65.875,81.4 U1RMOD.12@67.145,81.4 U1RMOD.15 U1RMOD.18 U1RMOD.20 U1RMOD.21 U1RMOD.22 U1RMOD.23 U1RMOD.25 U1RMOD.26 U1RMOD.27 U1RMOD.28 U1RMOD.30 U1RMOD.31 U1RMOD.32 U1SCOM.2 U1SCOM.3 U1SCOM.4 U1SCOM.5 U1SCOM.7 U1SCOM.8 U1SCOM.9 U1SCOM.10 U1SCOM.11 U1SCOM.13 U1SCOM.14 U1SCOM.15 U1SCOM.16 U1SCOM.17 U1SCOM.19 U1SCOM.20 U1SCOM.25 U1SCOM.32 U2MB.3 U2MB.8 U2MB.28 U5.12 U5.13 U5.14

## Polygon pours and split planes (outlines as drawn)
no net on GroundPlane (split plane): 78.137,108.332 78.254,108.254 78.332,108.137 78.356,108.017 78.353,108 78.353,56.897 75.75,56.897 75.74,56.895 75.18,56.851 74.623,56.718 74.095,56.499 73.607,56.2 73.172,55.828 72.8,55.393 72.501,54.905 72.282,54.377 72.149,53.82 72.105,53.26 72.103,53.25 72.103,50.647 51,50.647 50.983,50.644 50.863,50.668 50.746,50.746 50.668,50.863 50.644,50.983 50.647,51 50.647,102.103 53.25,102.103 53.26,102.105 53.82,102.149 54.377,102.282 54.905,102.501 55.393,102.8 55.828,103.172 56.2,103.607 56.499,104.095 56.718,104.623 56.851,105.18 56.895,105.74 56.897,105.75 56.897,108.353 78,108.353 78.017,108.356

## Silkscreen, mask and mechanical layers (free items; w line width, h text height)
Top Solder:
  circle w1: c53,56 r1.5
Bottom Solder:
  circle w1: c53,56 r1.5
Mechanical 16:
  lines w0.2: 50,102.75 50,51 ccw(c51,51) 51,50 72.75,50 72.75,53.25 cw(c75.75,53.25) 75.75,56.25 79,56.25 ; 53.25,102.75 ccw(c53.25,105.75) 56.25,105.75 56.25,109 78,109 cw(c78,108) 79,108 ; 79,56 79,107.75
  lines w0.254: 50,102.75 53.25,102.75